# Altium PCB PCB1.PcbDoc
Units mil, origin at the board's own origin, x right, y up, seen from the top; angles counter-clockwise.
Board outline 6000 x 4000 mil, 2 copper layers (Top Layer, Bottom Layer); 2 components, 6 nets, 14 pads, 0 vias.
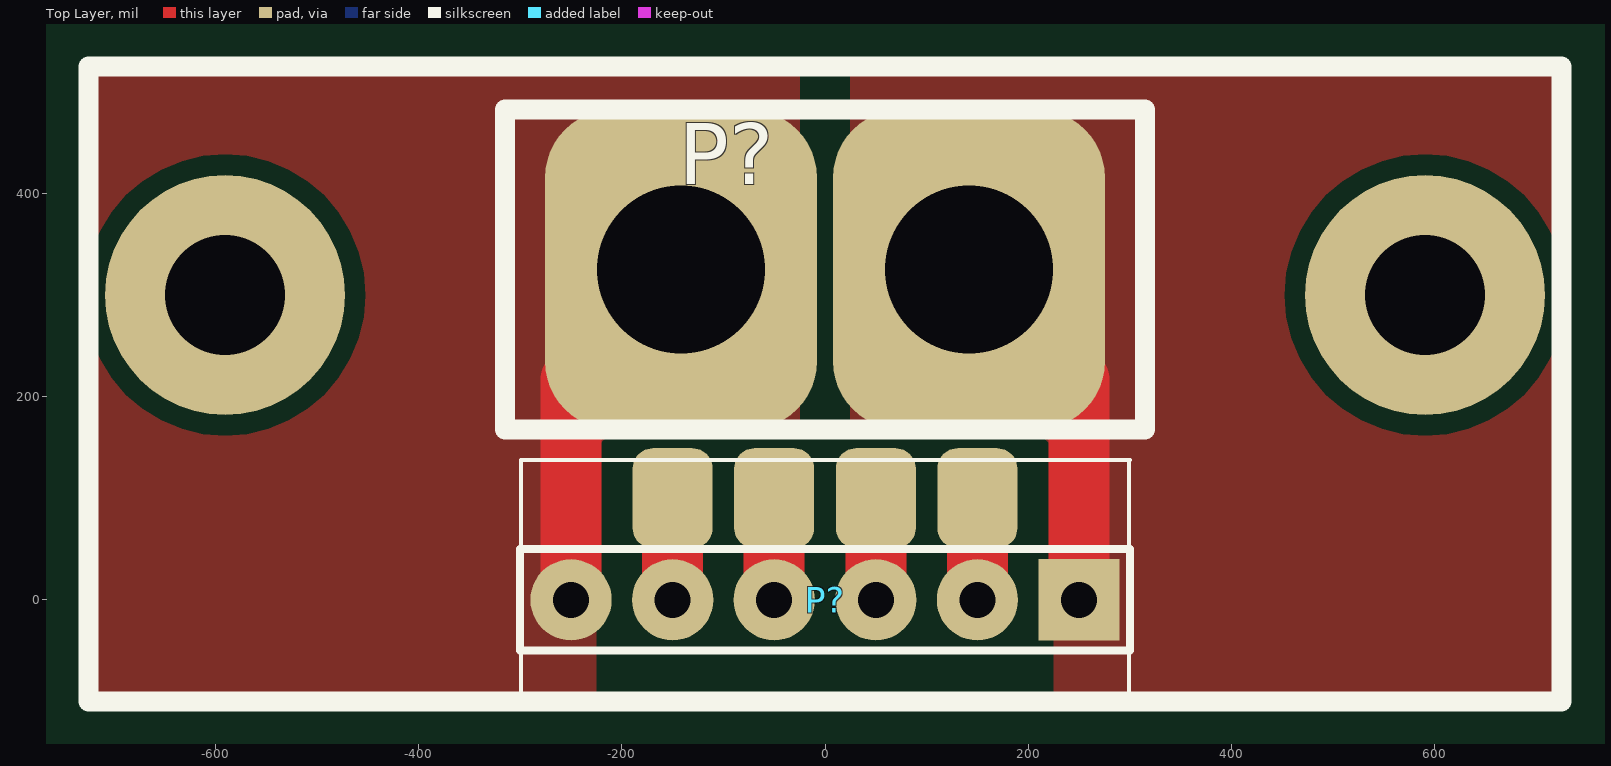
[diagram p0: Top Layer view]
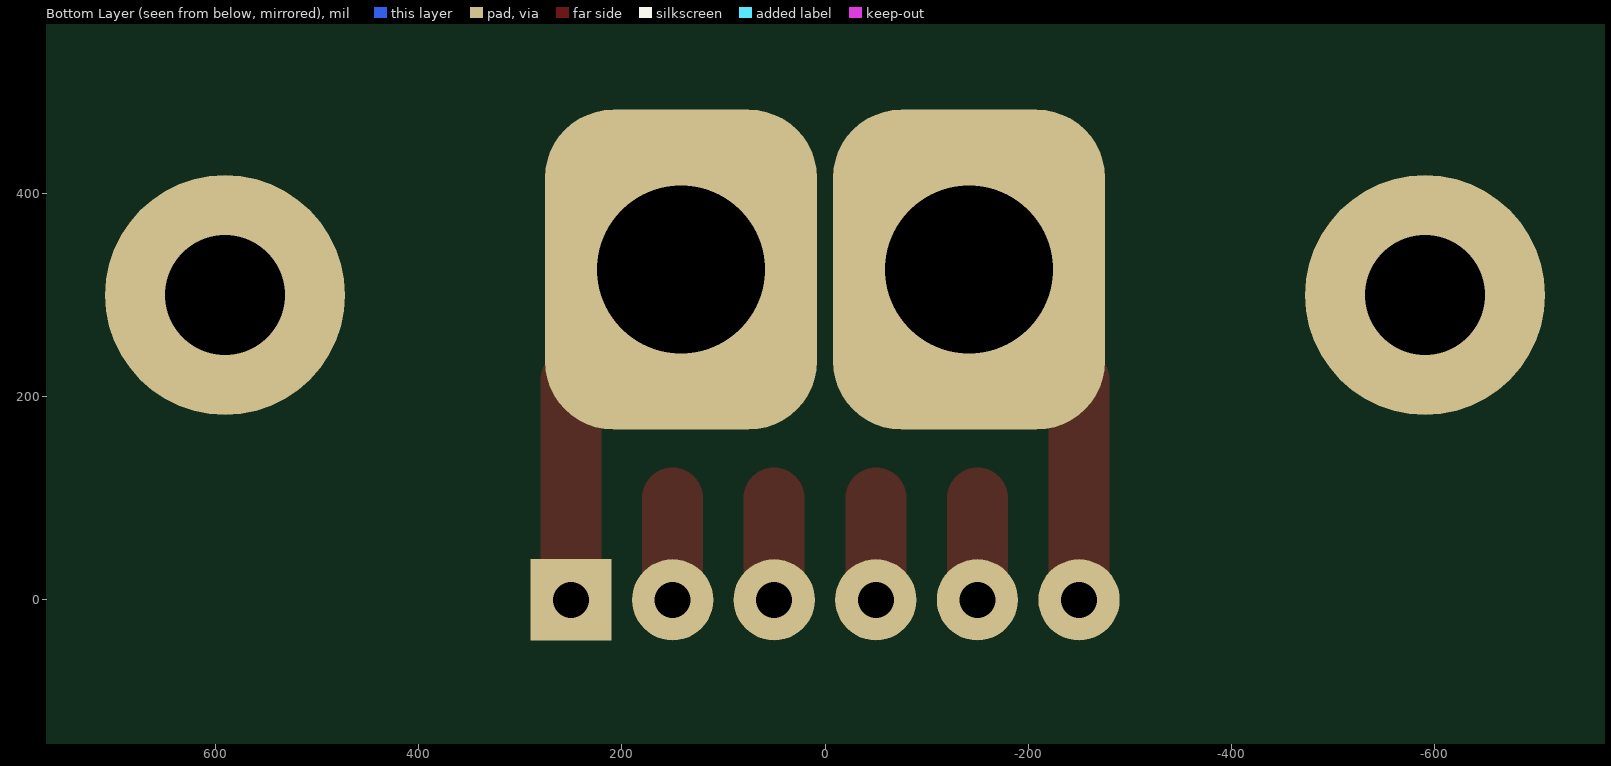
[diagram p1: Bottom Layer view, seen from below]

## Layer stack, top to bottom
Top Solder: solder mask 0.4, Solder Resist, Dk 3.5
Top Layer: signal copper 1.4
Dielectric 1: dielectric 12.6, FR-4, Dk 4.8
Bottom Layer: signal copper 1.4
Bottom Solder: solder mask 0.4, Solder Resist, Dk 3.5

## Board outline
-3400,-1500 2600,-1500 2600,2500 -3400,2500

## Design rules (kind name [scope] priority, off if disabled: settings)
Clearance [All] p1: gap=10 except(20: Arc-Poly Track-Poly SMDPad-Poly THPad-Poly Via-Poly Fill-Poly Poly-Poly)
PlaneConnect [All] p1: planeconnectstyle=Direct reliefexpansion=20 reliefentries=4 reliefconductorwidth=10 reliefairgap=10
PolygonConnect [All] p1: connectstyle=Direct reliefconductorwidth=10 reliefentries=4 polygonreliefangle="90 Angle" airgapwidth=10
RoutingVias [All] p1: holewidth=28 width=50 viastyle="Through Hole" minholewidth=28 minwidth=50 maxholewidth=28 maxwidth=50
SolderMaskExpansion [All] p1: expansion=4
Width [All] p1: maxlimit=60 minlimit=10 preferedwidth=10 minimp=50.000000 maximp=50.000000 favimp=50.000000
29 further rules are at their usual default settings.

## Classes and differential pairs
component class Sheet1: P?

## Components (designator, comment, footprint, x,y, rotation, side; value= is the part's Value field where it differs from the comment)
P? "Header 6" HDR1X6 250,0 r180 top
P? "Header 2" XT60_H 0,325 r180 top

## Footprints (in the part's own frame and the unit in brackets; to place one, negate y for a bottom-side part, rotate by r counter-clockwise, add the part's x,y. Pads: shape width x height; smd on the part's side, far side on the other; paste and mask are expansions set on the pad)
HDR1X6 [mil] "Connector; Header; 6 Position"
  rect 80x80 hole 35.43: 1(0,0)
  round 80 hole 35.43: 2(100,0) 3(200,0) 4(300,0) 5(400,0) 6(500,0)
  silkscreen extent -50,-50 550,50
XT60_H [mm]
  rrect50% 6.8x8 hole 4.2: 1(-3.6,0) 2(3.6,0)
  silkscreen extent -8,-4 8,4

## Part data
P?: "Header, 6-Pin"
P?: "Header, 2-Pin"

## Free pads (board coordinates)
  rrect50% 78.74x98.43 smd: 0(-150,100) 0(-50,100) 0(50,100) 0(150,100)
  round 236.22 hole 118.11: H(-590.55,300) H(590.55,300)

## Nets (pads, with @x,y where several pads share a name; then routed paths per layer and width w, separated by ;. In a path a pad name is that pad's centre, name@x,y a point inside that pad or via, vN(x,y) a via of type N, cw(c..) or ccw(c..) an arc to the next point about the centre after c; other vN are vias at no path point)
NETLABEL8: P?.2@150,0 pad.0@150,100 | length 100
  Top Layer w60: P?.2@150,0 pad.0@150,100
NETLABEL9: P?.3 pad.0@50,100 | length 100
  Top Layer w60: P?.3 pad.0@50,100
NETLABEL10: P?.4 pad.0@-50,100 | length 100
  Top Layer w60: P?.4 pad.0@-50,100
NETLABEL11: P?.5 pad.0@-150,100 | length 100
  Top Layer w60: P?.5 pad.0@-150,100
NetP?_1: P?.1 | length 216.7
  Top Layer w60: P?.1@250,0 P?.1@250,216.73
NetP?_2: P?.2@-141.73,325 P?.6 | length 369.8
  Top Layer w60: P?.6 -250,216.73 P?.2@-141.73,325

## Polygon pours and split planes (outlines as drawn)
NetP?_2 on Top Layer "BTM_FUSE_IN" (solid, remove dead copper, pour order 2): -25,525 -25,175 -200,175 -225,150 -225,-100 -725,-100 -725,525 -25,525
NetP?_1 on Top Layer "BTM_FUSE_IN" (solid, remove dead copper, pour order 0): 25,525 25,175 200,175 250,125 225,100 225,-100 725,-100 725,525 25,525

## Silkscreen, mask and mechanical layers (free items; w line width, h text height)
Top Overlay:
  lines w3.94: -299.21,-100 300,-100 ; -299.21,-98.43 -299.21,137.8 300,137.8 ; 299.21,-98.43 299.21,137.8
  lines w19.68: -725,-100 725,-100 725,525 -725,525 -725,-100